# Altium PCB PCB14.PcbDoc
Units mm, origin at the board's own origin, x right, y up, seen from the top; angles counter-clockwise.
Board outline 100 x 100 mm, 2 copper layers (Top Layer, Bottom Layer); 3 components, 2 nets, 6 pads, 1 vias.
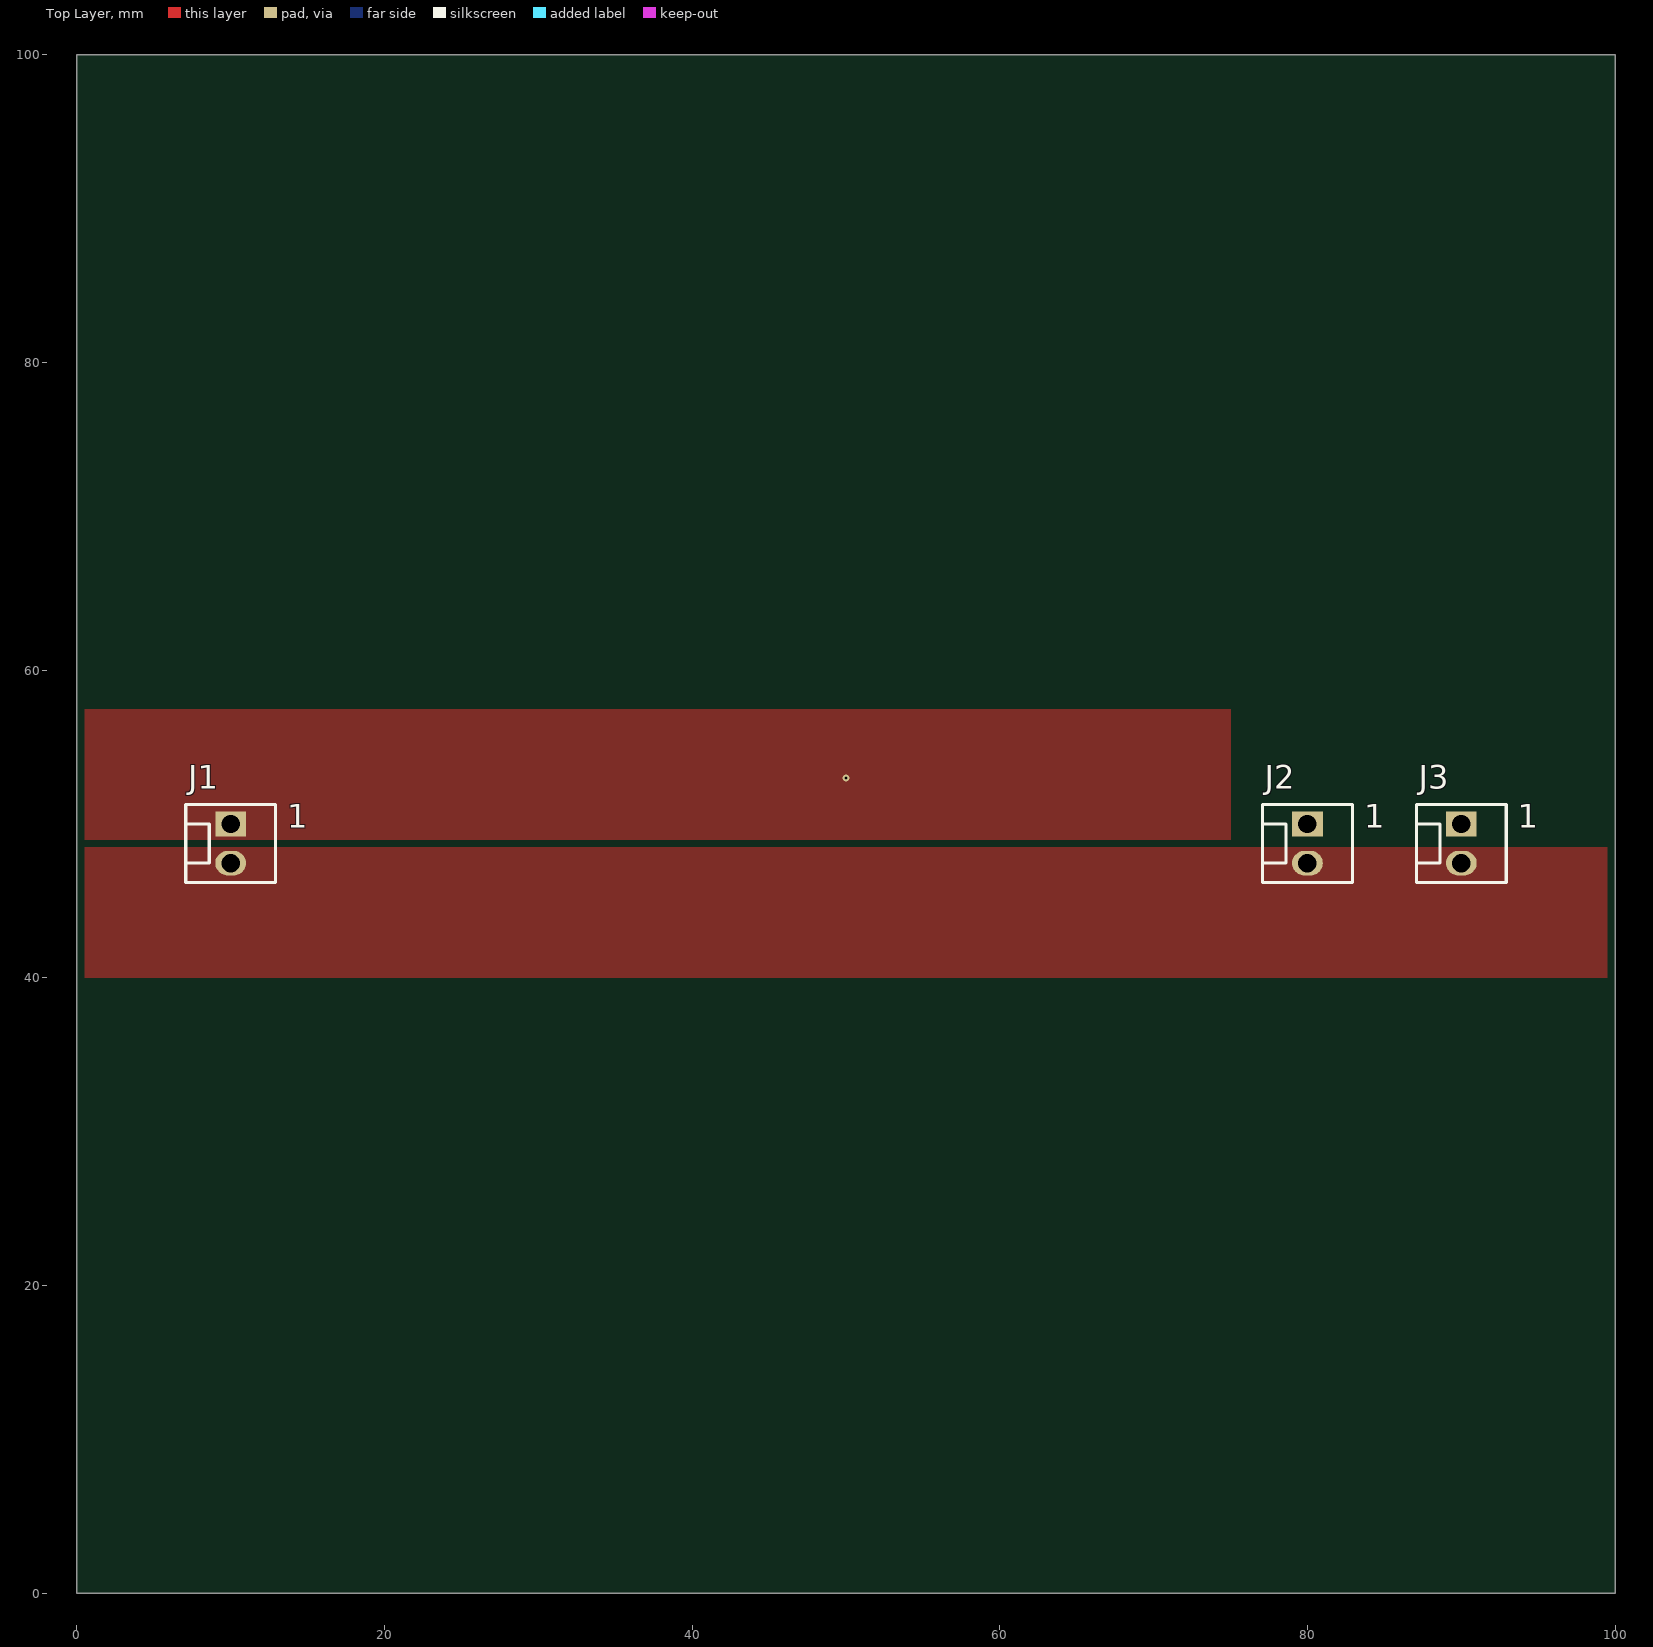
[diagram p0: Top Layer view]
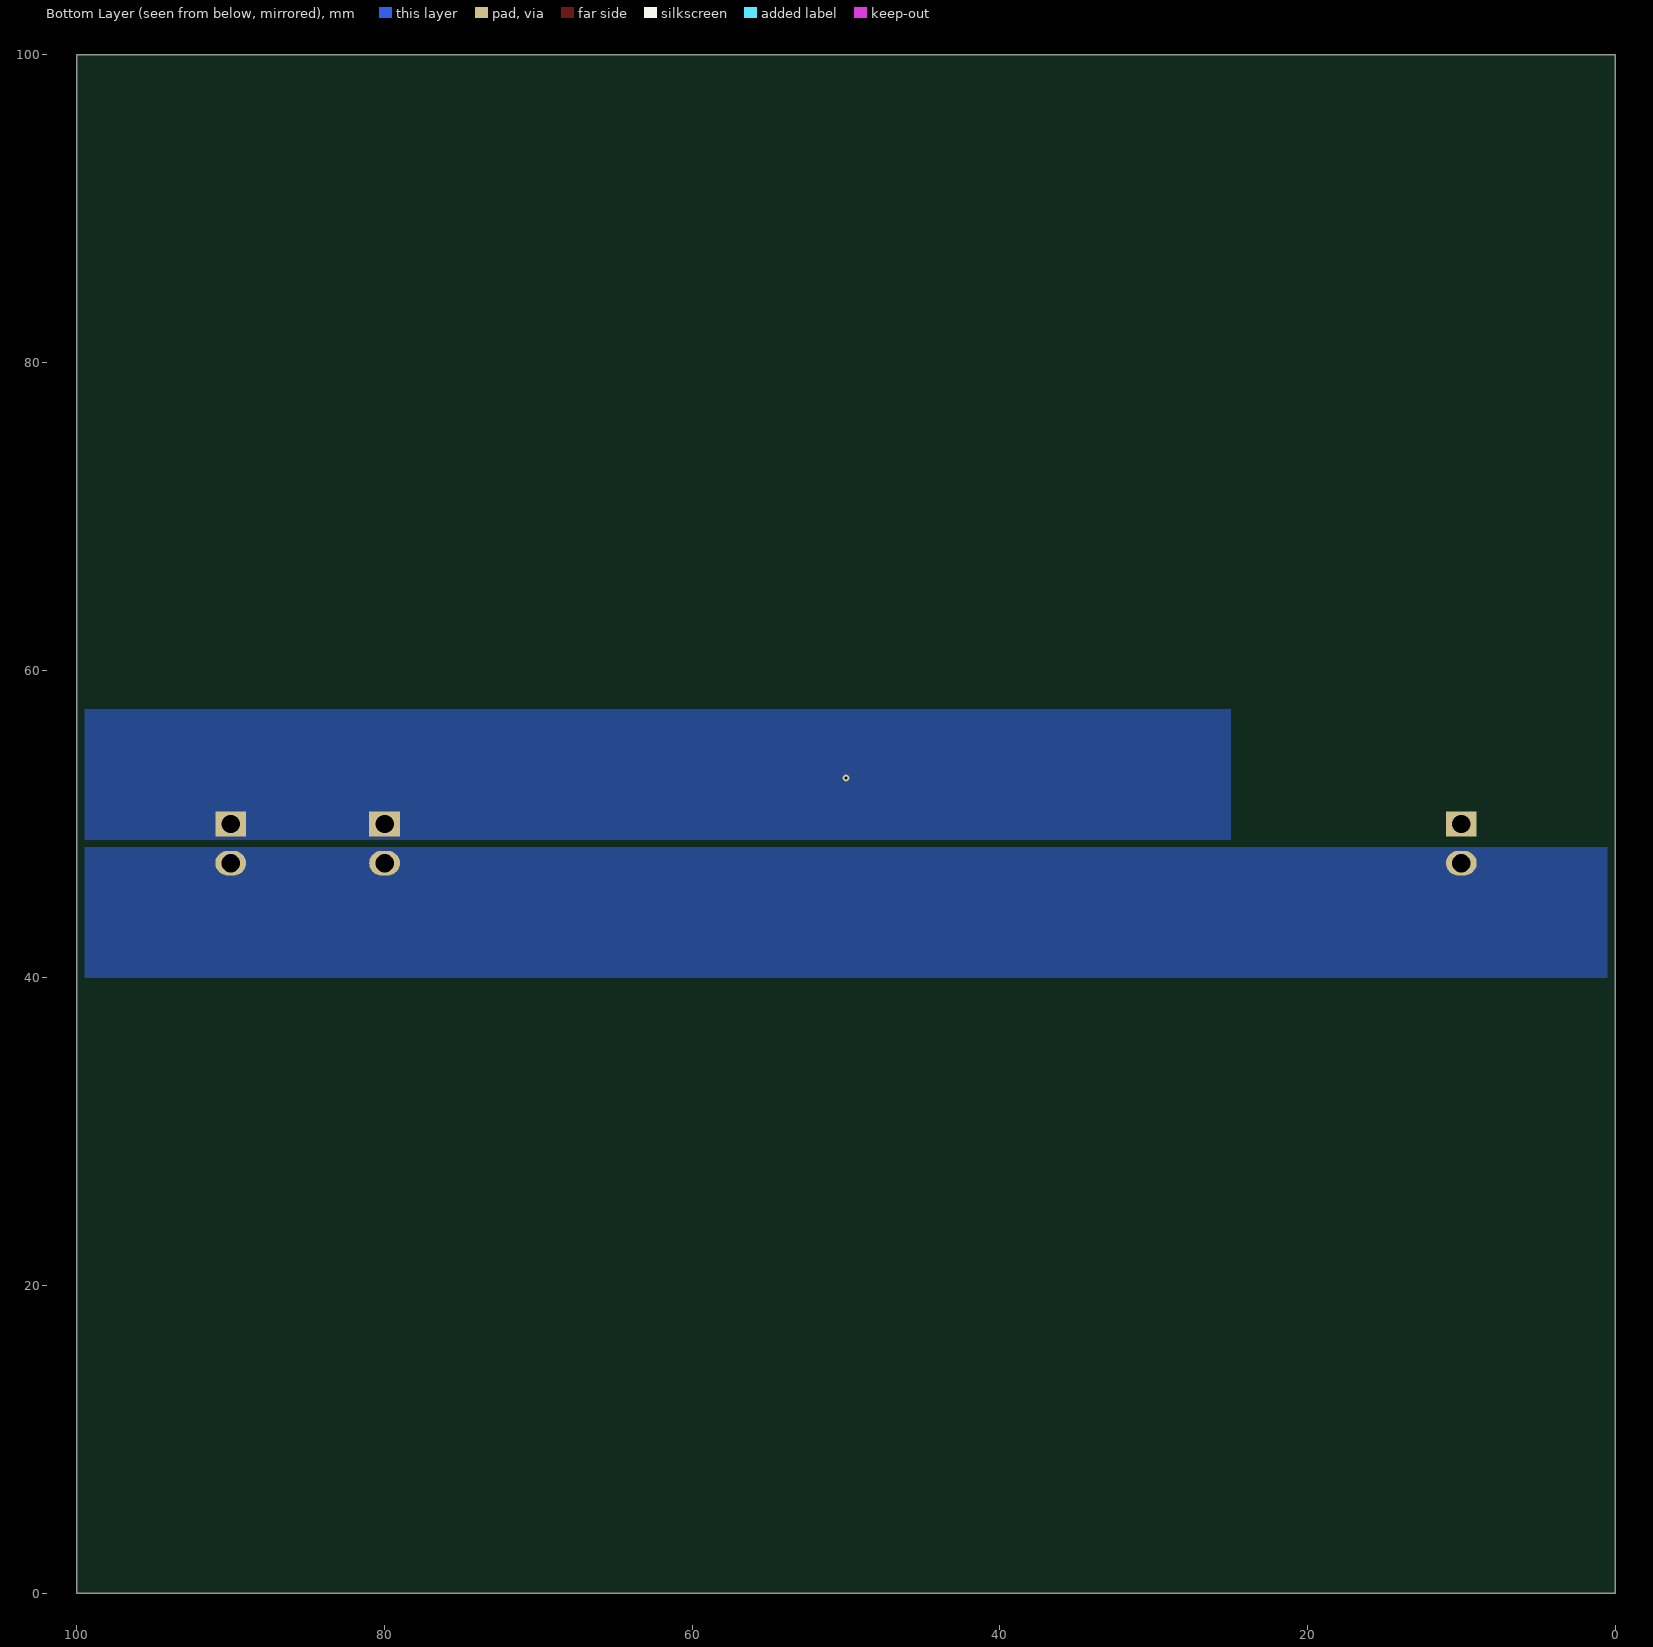
[diagram p1: Bottom Layer view, seen from below]
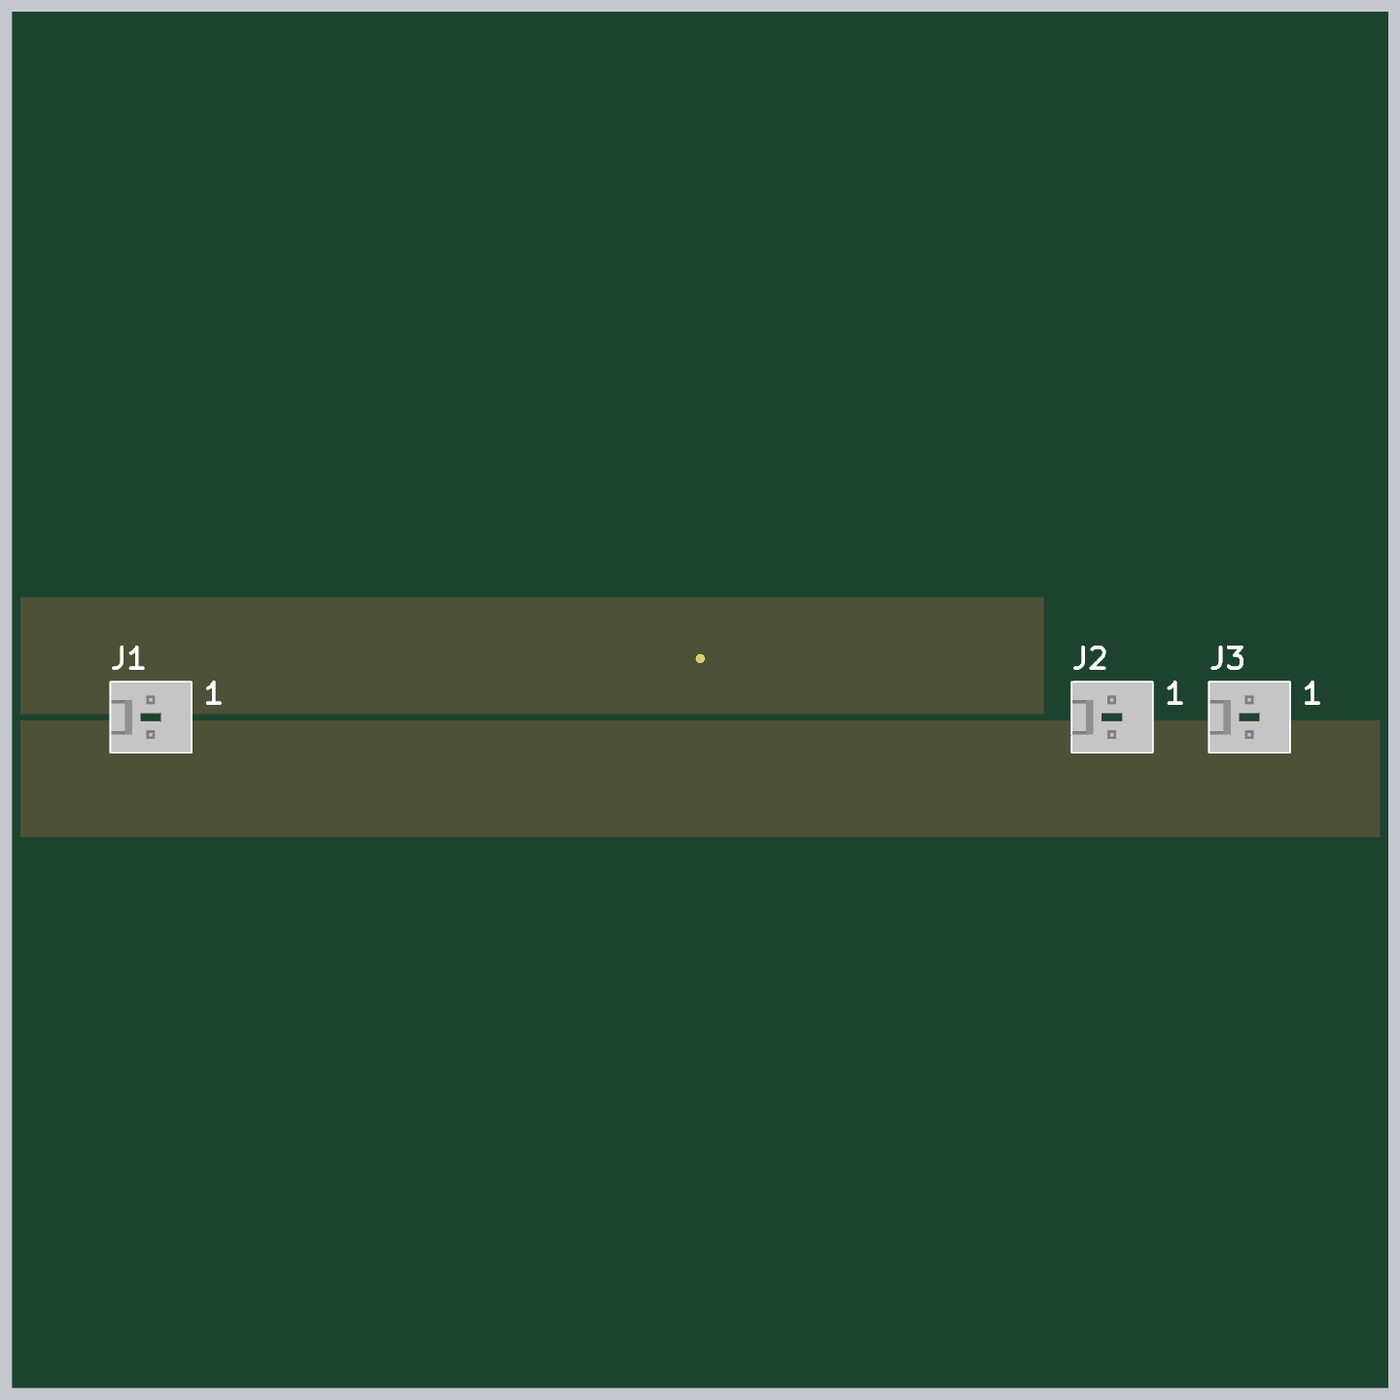
[diagram p2: 3D render of the assembled board from above, using the file's embedded part models]

## Layer stack, top to bottom
Top Solder: solder mask 0.0102, Solder Resist, Dk 3.5
Top Layer: signal copper 0.0356
Dielectric 1: dielectric 0.32, FR-4, Dk 4.8
Bottom Layer: signal copper 0.0356
Bottom Solder: solder mask 0.0102, Solder Resist, Dk 3.5

## Board outline
0,0 100,0 100,100 0,100

## Design rules (kind name [scope] priority, off if disabled: settings)
Clearance [All] p1: gap=0.1 ignorepadtopadclearanceinfootprint=FALSE
PolygonConnect [All] p1: connectstyle=Direct reliefconductorwidth=0.254 reliefentries=4 polygonreliefangle="90 Angle" airgapwidth=0.254
RoutingVias [All] p1: holewidth=0.711 width=1.27 viastyle="Through Hole" minholewidth=0.2 minwidth=0.4 maxholewidth=0.711 maxwidth=1.27
SolderMaskExpansion [All] p1: expansion=0.102 istentingtop=FALSE
Width [All] p1: maxlimit=50 minlimit=0.1 preferedwidth=0.3
30 further rules are at their usual default settings.

## Components (designator, comment, footprint, x,y, rotation, side; value= is the part's Value field where it differs from the comment)
J1 "1x2 Header" HDR1X2 10,50 r0 top
J2 "1x2 Header" HDR1X2 80,50 r0 top
J3 "1x2 Header" HDR1X2 90,50 r0 top

## Footprints (in the part's own frame and the unit in brackets; to place one, negate y for a bottom-side part, rotate by r counter-clockwise, add the part's x,y. Pads: shape width x height; smd on the part's side, far side on the other; paste and mask are expansions set on the pad)
HDR1X2 [mm]
  rect 2x1.6 hole 1.2: 1(0,0)
  oval 2x1.6 hole 1.2: 2(0,-2.54)
  silkscreen extent -2.92,-3.81 2.92,1.27, body extent -2.9,-3.81 2.9,1.27, height 11.71

## Part data
J1 J2 J3: library part 22-29-2021, "Headers & Wire Housings 2 PIN F/LK HEADER", Colour=White, Contact Resistance=10mR, Current Rating=4A, Flammability Rating="UL94 V-0", Manufacturer=Molex, Max Operating Temperature=75°C, Max Voltage Rating (AC)=250V, Min Operating Temperature=0°C, Package Quantity=2500, Supplier Part Number 1=WM2744-ND, Category=Connectors, ComponentLink1Description=https://datasheet.ciiva.com/30169/113840022292021-pcb-headers-30169888.pdf, ComponentLink1URL=https://datasheet.ciiva.com/30169/113840022292021-pcb-headers-30169888.pdf, ComponentLink2Description=https://datasheet.ciiva.com/19472/879588-19472951.pdf, ComponentLink2URL=https://datasheet.ciiva.com/19472/879588-19472951.pdf, ComponentLink3Description=https://datasheet.ciiva.com/11752/0900766b80d5fb7a-11752634.pdf, ComponentLink3URL=https://datasheet.ciiva.com/11752/0900766b80d5fb7a-11752634.pdf, ComponentLink4Description=https://datasheet.ciiva.com/5153/0022292021-pcb-headers-159390-5153053.pdf, ComponentLink4URL=https://datasheet.ciiva.com/5153/0022292021-pcb-headers-159390-5153053.pdf, ComponentLink5Description=https://datasheet.ciiva.com/9468/0022292021-pcb-headers-9468301.pdf, ComponentLink5URL=https://datasheet.ciiva.com/9468/0022292021-pcb-headers-9468301.pdf, ComponentLink6Description=https://datasheet.ciiva.com/25908/0022292021-pcb-headers-25908286.pdf, ComponentLink6URL=https://datasheet.ciiva.com/25908/0022292021-pcb-headers-25908286.pdf, Contact Material=Brass, Contact Plating=Gold, Depth=5.8mm, Gender=Male, Glow Wire Compliant=Non-compliant, Halogen Free="Low Halogen", Height=11.7mm, Housing Colour=White, Housing Material=Nylon, Lead Free="Lead Free", Length=12.7mm, Manufacturer Part Number=22-29-2021, Max Current Rating=4A, Mount="Through Hole", Number of Circuits=2, Number of Contacts=2, Number of Positions=2, Number of Rows=1, Orientation=Straight, Packaging=Bulk, Pitch=2.54mm, Pricing 1="1=0.46, 10=0.431, 100=0.3014, 500=0.2583, 1000=0.21525, 5000=0.1845, 10000=0.1722 (USD)", Radiation Hardening=No, REACH SVHC=Unknown, Stock 1=17589, Supplier 1=Digi-Key, Termination="Through Hole", Voltage Rating=250V, Voltage Rating (DC)=250V

## Via types
v1: diameter 0.45, hole 0.2, Top Layer to Bottom Layer, 1 vias

## Nets (pads, with @x,y where several pads share a name; then routed paths per layer and width w, separated by ;. In a path a pad name is that pad's centre, name@x,y a point inside that pad or via, vN(x,y) a via of type N, cw(c..) or ccw(c..) an arc to the next point about the centre after c; other vN are vias at no path point)
+VCC: J1.1 J2.1 J3.1
  other v1: 50,53
GND: J1.2 J2.2 J3.2

## Polygon pours and split planes (outlines as drawn)
+VCC on Top Layer "+VCC_L01_P001" (solid, pour order 1): 0.5,48.96 75,48.96 75,57.46 0.5,57.46
GND on Top Layer "GND_L01_P000" (solid, pour order 0): 0.5,48.5 99.5,48.5 99.5,40 0.5,40
+VCC on Bottom Layer "+VCC_L02_P003" (solid, pour order 3): 25,48.96 99.5,48.96 99.5,57.46 25,57.46
GND on Bottom Layer "GND_L02_P002" (solid, pour order 2): 0.5,48.5 99.5,48.5 99.5,40 0.5,40

## Silkscreen, mask and mechanical layers (free items; w line width, h text height)
Board:
  the board outline again, w0.2

## Text inside footprints (layer, text, board x,y; h text height)
J1: Top Overlay "1" at 13.683,49.746 h1.52
J2: Top Overlay "1" at 83.683,49.746 h1.52
J3: Top Overlay "1" at 93.683,49.746 h1.52